# EAGLE board PCB v62 (EAGLE 9.7.0)
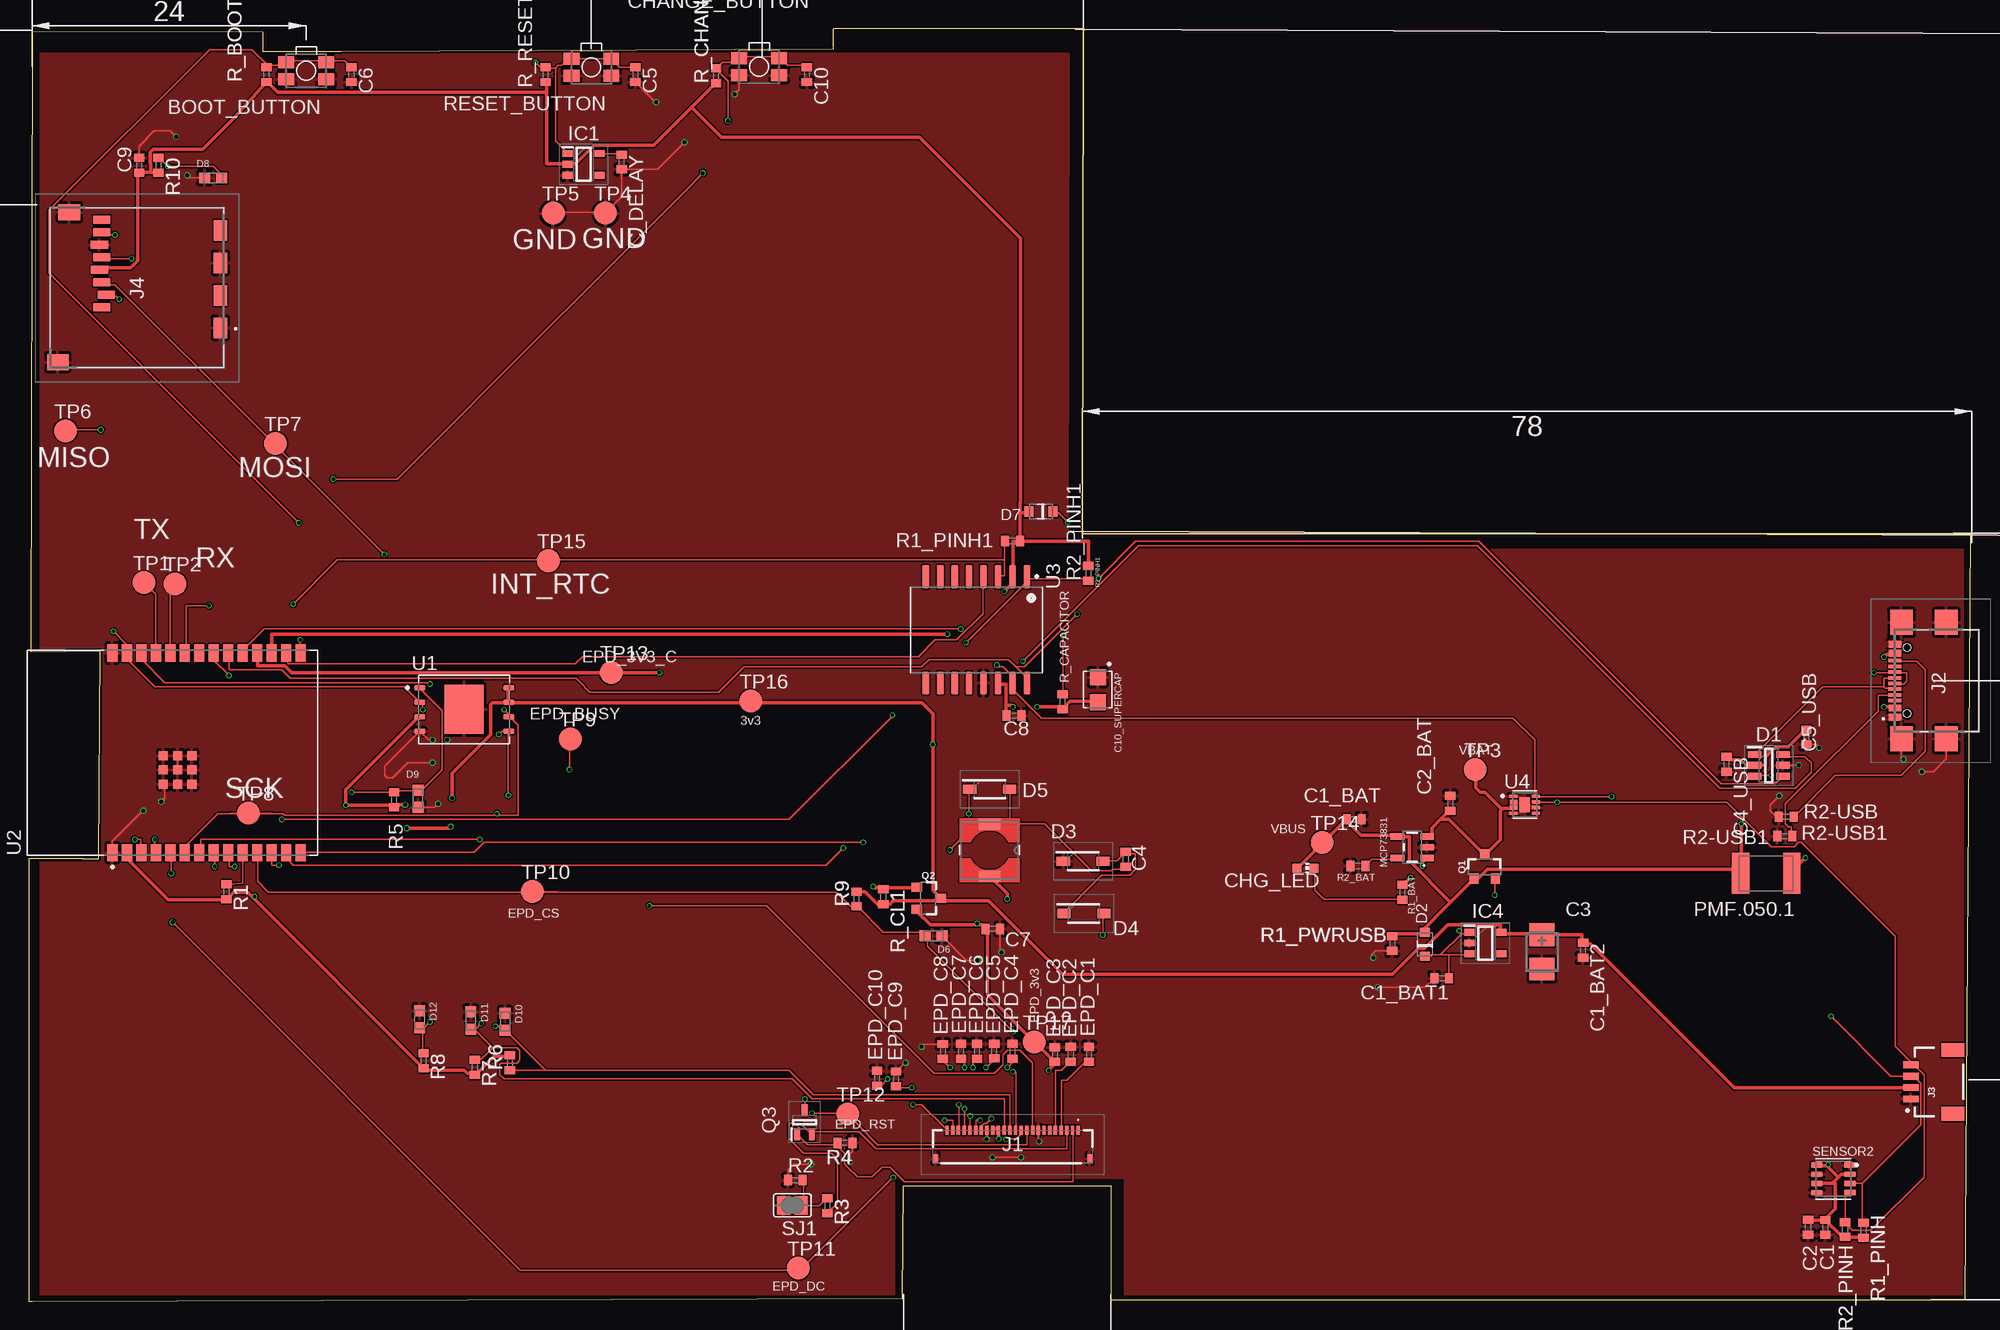
[diagram p0: board, top side]
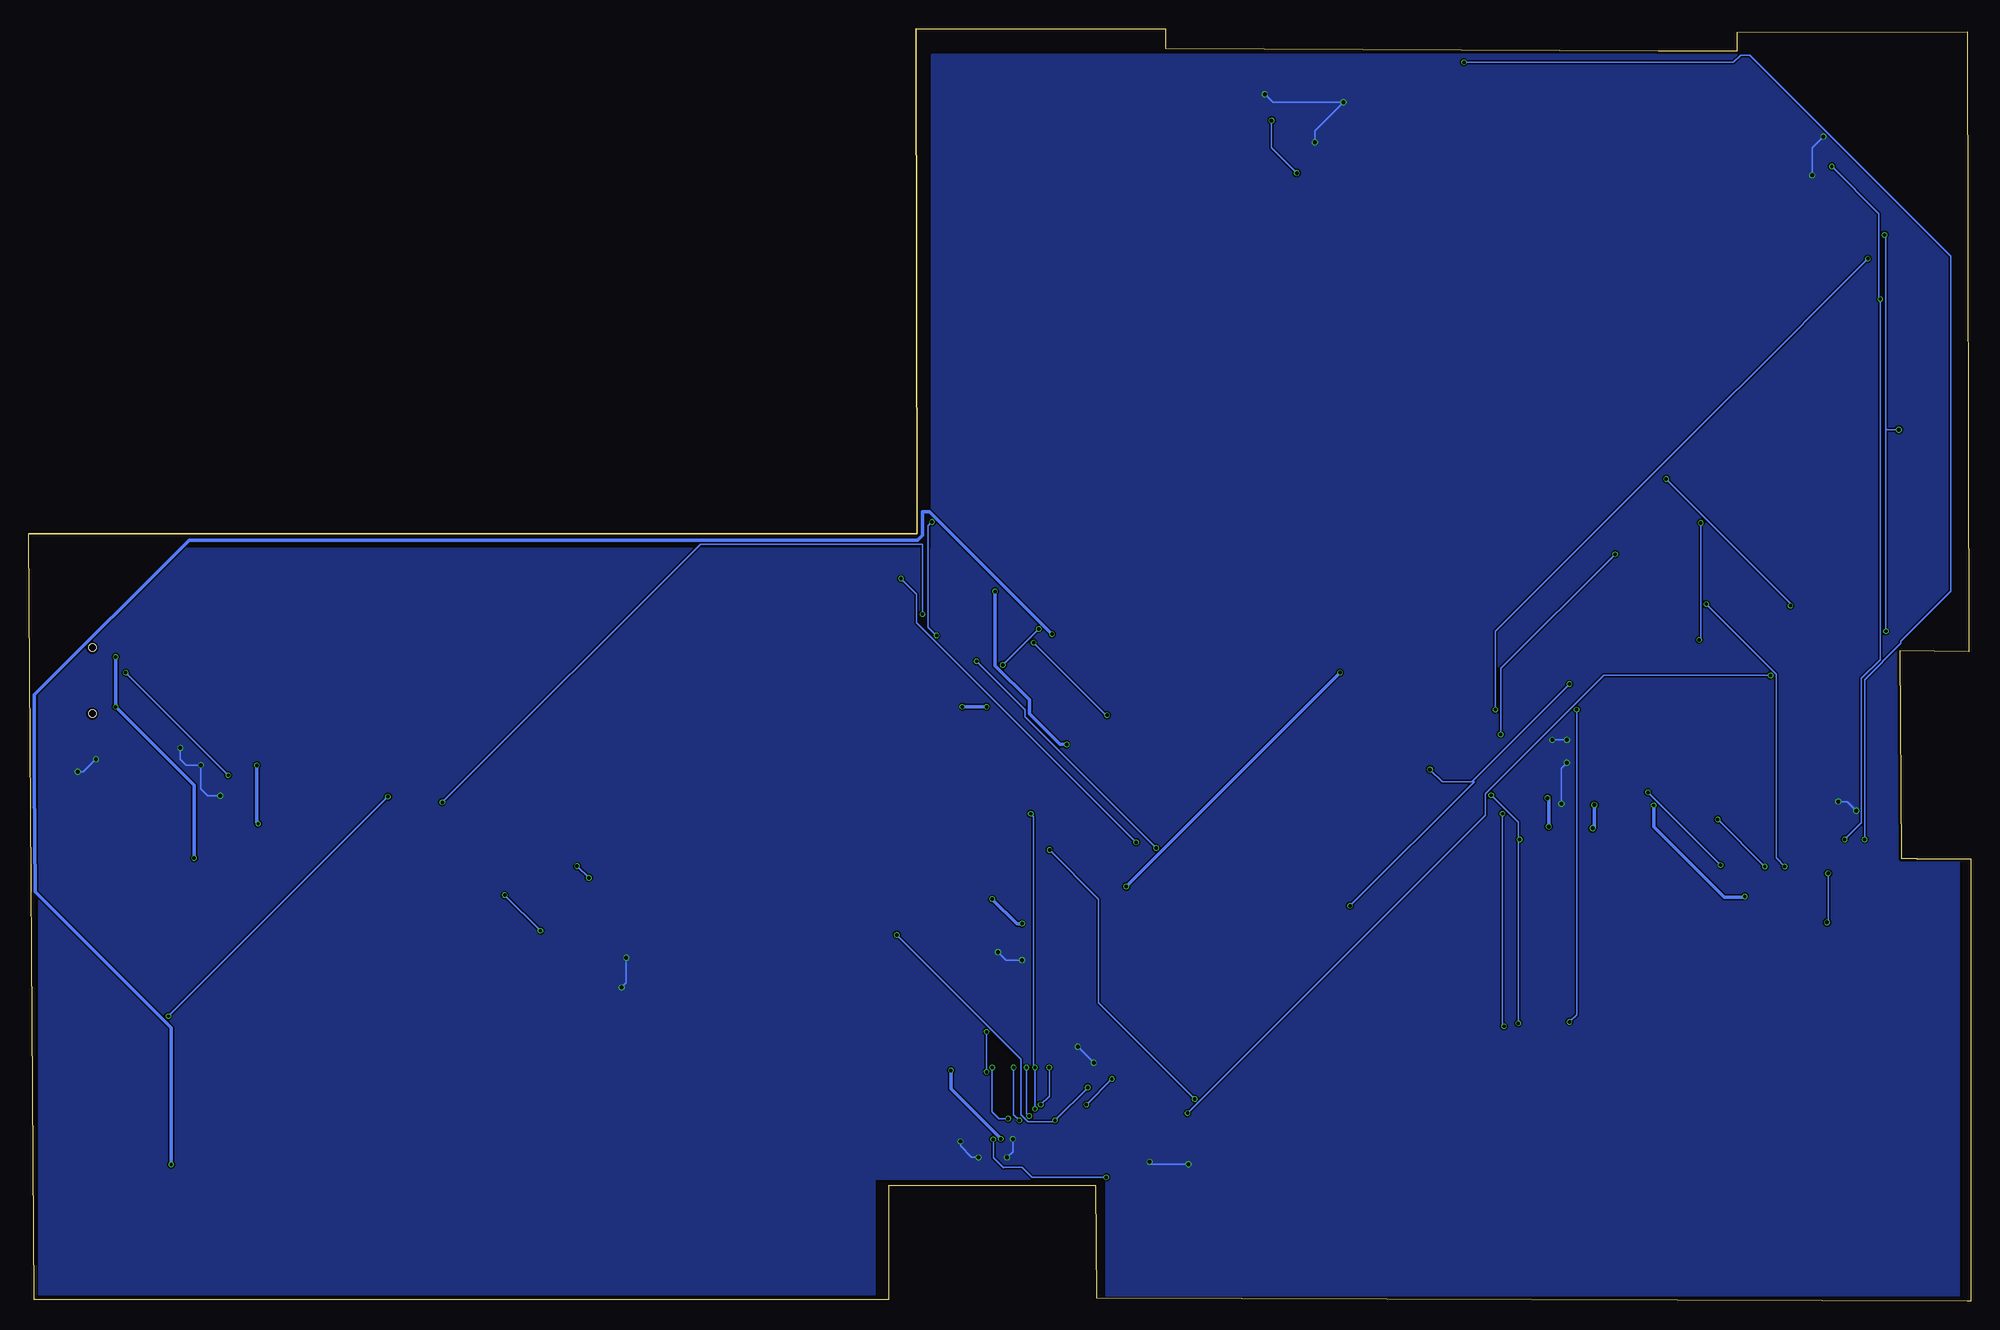
[diagram p1: board, bottom side, seen from below]

Size 170.35 x 111.57 mm. Coordinates in mm from the lower left corner, seen from the top.
Outline: 0.33,0 76.63,0.27 76.73,10.1 94.93,10.1 94.93,0.1 169.83,0.1 170.35,67.27 92.43,67.27 92.53,111.54 70.61,111.57 70.61,109.8 27.43,109.6 20.55,109.6 20.55,111.26 0.33,111.3 0.2,56.94 6.23,57.04 6.13,38.8 4.77,38.8 0,38.8 0.03,0 0.33,0
Copper layers (1*16): Top 0.035mm / dielectric 1.6mm / Bottom 0.035mm
Design rules "jlcpcb-2layers.dru": minimum track width 0.15mm, minimum drill 0.3mm, track to track 5mil, track to pad 5mil, pad to pad 5mil, via to via 5mil, smd to smd 5mil, copper to edge 0.2mm, drill to drill 6mil, minimum pad ring 10mil, minimum via ring 3mil, stop-mask expansion 4mil, vias tented up to drill 0mil, thermal gap 10mil
Net classes: 1 PowerLines: width 0.3 mm

## Footprints (pad centres in the part's own frame; a part is rotated, then mirrored left to right if it is on the bottom)
MYBUTTON = smd 1.4 x 1.05: 1 1.75,0.75; 2 -1.75,0.75; 3 -1.75,-0.75; 4 1.75,-0.75
EAGLE-LTSPICE_C0402 = smd 0.7 x 0.9: 1 -0.65,0; 2 0.65,0
RCL_CT3528 = smd 2 x 2.2: + -1.5,0; - 1.5,0
CAPCP3225X100N = smd 1.4 x 1.4: 1 -1.1,0; 2 1.1,0
ADAFRUIT_CHIP-LED0603 = smd 0.8 x 0.8: A 0,-0.75; C 0,0.75
SOT95P280X145-6N = smd 1.2 x 0.6: 1 -1.25,0.95; 2 -1.25,0; 3 -1.25,-0.95; 4 1.25,-0.95; 5 1.25,0; 6 1.25,0.95
ESP32_WROVER_AVX---SD0805S020S1R0_AVX_SD0805S020S1R0_0 = smd 0.8 x 0.9: 1 -1.05,0; 2 1.05,0
SOD3716X135N = smd 1.15 x 0.8: 1 -1.75,0; 2 1.75,0
DIOC1608X36N = smd 0.97 x 0.94: 1 -0.75,0; 2 0.75,0
SOT95P280X125-5N = smd 0.9 x 0.6: 1 -1.4,0.95; 2 -1.4,0; 3 -1.4,-0.95; 4 1.4,-0.95; 5 1.4,0.95
FH34SRJ24S05SH99 = smd 0.3 x 0.8: 1 5.75,1.45; 2 5.25,1.45; 3 4.75,1.45; 4 4.25,1.45; 5 3.75,1.45; 6 3.25,1.45; 7 2.75,1.45; 8 2.25,1.45; 9 1.75,1.45; 10 1.25,1.45; 11 0.75,1.45; 12 0.25,1.45; 13 -0.25,1.45; 14 -0.75,1.45; 15 -1.25,1.45; 16 -1.75,1.45; 17 -2.25,1.45; 18 -2.75,1.45; 19 -3.25,1.45; 20 -3.75,1.45; 21 -4.25,1.45; 22 -4.75,1.45; 23 -5.25,1.45; 24 -5.75,1.45 | smd 0.4 x 0.8: MP1 6.75,-1.05; MP2 -6.75,-1.05
SAMACSYS_PARTS_USB4110GFA = smd 0.3 x 1.099: A1 -3.35,3.678; A4 -2.55,3.678; A9 2.55,3.678; A12 3.35,3.678; B1 3.05,3.678; B4 2.25,3.678; B9 -2.25,3.678; B12 -3.05,3.678 | smd 0.3 x 1.15: A5 -1.25,3.678; A6 -0.25,3.678; A7 0.25,3.678; A8 1.25,3.678; B5 1.75,3.678; B6 0.75,3.678; B7 -0.75,3.678; B8 -1.75,3.678 | smd 2.18 x 2: MP1 -5.11,-0.827; MP2 5.11,-0.827; MP3 -5.11,3.103; MP4 5.11,3.103 | hole 0.65: -2.89,2.603; 2.89,2.603
JST04_1MM_RA = smd 0.6 x 1.35: 1 -1.5,0; 2 -0.5,0; 3 0.5,0; 4 1.5,0 | smd 1.2 x 2: NC1 2.8,-3.675; NC2 -2.8,-3.675
112ATAARR03ATTEND = smd 1.8 x 1.2: G1 10.6,10.4; G2 4.9,10.4; S1 7.75,10.4; S2 2.05,10.4 | smd 1.4 x 1.9: G3 13.6,-3.85; G4 0.45,-2.85 | smd 0.7 x 1.5: P1 8.8,0; P2 7.7,0.4; P3 6.6,0; P4 5.5,-0.2; P5 4.4,0; P6 3.3,-0.2; P7 2.2,0; P8 1.1,0
IND_4828-WE-TPC_WRE = smd 0.965 x 1.93: 1 -2.286,0; 2 2.286,0
ESP32_WROVER_SPARKFUN-IC-POWER_SOT23-5 = smd 0.55 x 1.2: 1 -0.95,-1.3; 2 0,-1.3; 3 0.95,-1.3; 4 0.95,1.3; 5 -0.95,1.3
ESP32C6_VARISTOR_CT/CN1812 = smd 1.5 x 3.6: 1 -2.25,0; 2 2.25,0
ESP32_WROVER_SPARKFUN-DISCRETESEMI_SOT23-3 = smd 0.8 x 0.9: 1 -0.95,-1; 2 0.95,-1; 3 0,1.1
SOT65P210X110-3N = smd 1.05 x 0.5: 1 -1.05,0.65; 2 -1.05,-0.65; 3 1.05,0
ESP32_WROVER_EAGLE-LTSPICE_R0402 = smd 0.7 x 0.9: 1 -0.65,0; 2 0.65,0
ESP32_WROVER_BME680_PSON80P300X300X100-8N = smd 1.016 x 0.5: 1 1.458,1.2; 2 1.458,0.4; 3 1.458,-0.4; 4 1.458,-1.2; 5 -1.458,-1.22; 6 -1.458,-0.4; 7 -1.458,0.4; 8 -1.458,1.2
SJ = smd 1.168 x 1.6: 1 -0.762,0; 2 0.762,0
TP20R = smd 2 x 2: TP 0,0
SON127P600X800X80-9N = smd 0.94 x 0.44: 1 -3.895,1.905; 2 -3.895,0.635; 3 -3.895,-0.635; 4 -3.895,-1.905; 5 3.895,-1.905; 6 3.895,-0.635; 7 3.895,0.635; 8 3.895,1.905 | smd 3.4 x 4.3: 9 0,0
XCVR_ESP32-C6-WROOM-1-N8 = smd 1.5 x 0.9: 1 -8.75,5.26; 2 -8.75,3.99; 3 -8.75,2.72; 4 -8.75,1.45; 5 -8.75,0.18; 6 -8.75,-1.09; 7 -8.75,-2.36; 8 -8.75,-3.63; 9 -8.75,-4.9; 10 -8.75,-6.17; 11 -8.75,-7.44; 12 -8.75,-8.71; 13 -8.75,-9.98; 14 -8.75,-11.25; 15 8.75,-11.25; 16 8.75,-9.98; 17 8.75,-8.71; 18 8.75,-7.44; 19 8.75,-6.17; 20 8.75,-4.9; 21 8.75,-3.63; 22 8.75,-2.36; 23 8.75,-1.09; 24 8.75,0.18; 25 8.75,1.45; 26 8.75,2.72; 27 8.75,3.99; 28 8.75,5.26 | smd 0.8 x 0.8: 29_1 -2.755,0.79; 29_2 -1.505,0.79; 29_3 -0.255,0.79; 29_4 -2.755,-0.46; 29_5 -1.505,-0.46; 29_6 -0.255,-0.46; 29_7 -2.755,-1.71; 29_8 -1.505,-1.71; 29_9 -0.255,-1.71
SOIC127P1032X265-16N = smd 2.05 x 0.59: 1 -4.655,4.445; 2 -4.655,3.175; 3 -4.655,1.905; 4 -4.655,0.635; 5 -4.655,-0.635; 6 -4.655,-1.905; 7 -4.655,-3.175; 8 -4.655,-4.445; 9 4.655,-4.445; 10 4.655,-3.175; 11 4.655,-1.905; 12 4.655,-0.635; 13 4.655,0.635; 14 4.655,1.905; 15 4.655,3.175; 16 4.655,4.445
SON50P200X200X80-9N = smd 0.76 x 0.27: 1 -0.985,0.75; 4 -0.985,-0.75; 5 0.985,-0.75; 6 0.985,-0.25; 7 0.985,0.25; 8 0.985,0.75 | smd 0.762 x 0.406: 2 -0.985,0.25; 3 -0.985,-0.25 | smd 0.9 x 1.3: 9 0,0

## Placement (x,y rotation side)
BOOT_BUTTON  BUTTON_CUSYOMV1  [MYBUTTON]  24.35,107.86 180 top
C1  100nF  [EAGLE-LTSPICE_C0402]  157.56,6.46 270 top
C1_BAT  4.7uF  [EAGLE-LTSPICE_C0402]  116.26,42.25 0 top
C1_BAT1  4.7uF  [EAGLE-LTSPICE_C0402]  123.92,28.31 180 top
C1_BAT2  4.7uF  [EAGLE-LTSPICE_C0402]  136.32,30.75 270 top
C2  100nF  [EAGLE-LTSPICE_C0402]  156.06,6.48 270 top
C2_BAT  4.7uF  [EAGLE-LTSPICE_C0402]  124.68,43.64 90 top
C3  100uF  [RCL_CT3528]  132.73,30.61 270 top
C4  4.7uF/25V  [EAGLE-LTSPICE_C0402]  96.22,38.75 270 top
C4_USB  100nF  [EAGLE-LTSPICE_C0402]  148.9,47.06 270 top
C5  1uF  [EAGLE-LTSPICE_C0402]  53.22,107.53 270 top
C5_USB  4.7uF  [EAGLE-LTSPICE_C0402]  155.9,49.45 270 top
C6  100nF  [EAGLE-LTSPICE_C0402]  28.32,107.53 270 top
C7  10uF  [EAGLE-LTSPICE_C0402]  84.56,32.63 0 top
C8  100nF  [EAGLE-LTSPICE_C0402]  86.43,51.33 0 top
C9  100nF  [EAGLE-LTSPICE_C0402]  9.7,99.58 90 top
C10  100nF  [EAGLE-LTSPICE_C0402]  68.26,107.53 270 top
C10_SUPERCAP  CPH3225A  [CAPCP3225X100N]  93.77,53.61 270 top
C_DELAY  100nF  [EAGLE-LTSPICE_C0402]  52.02,99.87 270 top
CHANGE_BUTTON  BUTTON_CUSYOMV1  [MYBUTTON]  64.07,108.23 180 top
CHG_LED  [ADAFRUIT_CHIP-LED0603]  111.98,37.96 270 top
D1  USBLC6-2SC6Y  [SOT95P280X145-6N]  152.61,46.97 0 top
D2  ESP32_WROVER_AVX---SD0805S020S1R0_AVX_SD0805S020S1R0_0_0AVX_SD0805S020S1R0_0_0  [ESP32_WROVER_AVX---SD0805S020S1R0_AVX_SD0805S020S1R0_0]  122.45,31.29 90 top
D3  MBR0530  [SOD3716X135N]  92.49,38.57 0 top
D4  MBR0530  [SOD3716X135N]  92.55,33.98 0 top
D5  MBR0530  [SOD3716X135N]  84.29,44.88 0 top
D6  PGB1010603MR  [DIOC1608X36N]  79.35,32.03 180 top
D7  ESP32_WROVER_AVX---SD0805S020S1R0_AVX_SD0805S020S1R0_0_0AVX_SD0805S020S1R0_0_0  [ESP32_WROVER_AVX---SD0805S020S1R0_AVX_SD0805S020S1R0_0]  88.79,69.22 180 top
D8  PGB1010603MR  [DIOC1608X36N]  16.19,98.47 0 top
D9  PGB1010603MR  [DIOC1608X36N]  34.16,44.04 90 top
D10  PGB1010603MR  [DIOC1608X36N]  41.8,24.48 270 top
D11  PGB1010603MR  [DIOC1608X36N]  38.8,24.6 270 top
D12  PGB1010603MR  [DIOC1608X36N]  34.3,24.72 270 top
EPD_C1  1uF/50V  [EAGLE-LTSPICE_C0402]  93,21.64 270 top
EPD_C2  1uF/50V  [EAGLE-LTSPICE_C0402]  91.4,21.63 270 top
EPD_C3  1uF/50V  [EAGLE-LTSPICE_C0402]  90,21.62 270 top
EPD_C4  1uF/50V  [EAGLE-LTSPICE_C0402]  86.3,21.91 270 top
EPD_C5  1uF/50V  [EAGLE-LTSPICE_C0402]  84.68,21.92 270 top
EPD_C6  1uF/50V  [EAGLE-LTSPICE_C0402]  83.18,21.91 270 top
EPD_C7  1uF/50V  [EAGLE-LTSPICE_C0402]  81.78,21.9 270 top
EPD_C8  1uF/50V  [EAGLE-LTSPICE_C0402]  80.18,21.89 270 top
EPD_C9  1uF/50V  [EAGLE-LTSPICE_C0402]  76.08,19.48 270 top
EPD_C10  1uF/50V  [EAGLE-LTSPICE_C0402]  74.42,19.53 270 top
IC1  BD5229G-TR  [SOT95P280X125-5N]  48.68,99.67 0 top
IC4  XC6220A331MR-G  [SOT95P280X125-5N]  127.76,31.39 0 top
J1  FH34SRJ-24S-0.5SH_99_  [FH34SRJ24S05SH99]  86.3,13.54 0 top
J2  SAMACSYS_PARTS_USB4110-GF-A  [SAMACSYS_PARTS_USB4110GFA]  167.36,54.4 90 top
J3  QWIIC_RIGHT_ANGLE  [JST04_1MM_RA]  165.08,19.22 90 top
J4  112A-TAAR-R03_ATTEND  [112ATAARR03ATTEND]  6.42,95.92 270 top
L1  744043680IND_4828-WE-TPC_WRE  [IND_4828-WE-TPC_WRE]  84.28,39.53 270 top
MCP73831  ESP32_WROVER_SPARKFUN-IC-POWER_MCP73831  [ESP32_WROVER_SPARKFUN-IC-POWER_SOT23-5]  121.34,39.79 90 top
PMF.050.1  ESP32C6_VARISTORCN1812  [ESP32C6_VARISTOR_CT/CN1812]  152.39,37.5 180 top
Q1  20V/4.2A/52mΩ/1.4W  [ESP32_WROVER_SPARKFUN-DISCRETESEMI_SOT23-3]  127.69,38.06 0 top
Q2  20V/4.2A/52mΩ/1.4W  [ESP32_WROVER_SPARKFUN-DISCRETESEMI_SOT23-3]  78.89,35.32 270 top
Q3  SI1308EDL-T1-GE3  [SOT65P210X110-3N]  68.05,15.69 90 top
R1  10K  [ESP32_WROVER_EAGLE-LTSPICE_R0402]  17.36,35.89 270 top
R1_BAT  200  [ESP32_WROVER_EAGLE-LTSPICE_R0402]  120.48,35.85 270 top
R1_PINH  10K  [ESP32_WROVER_EAGLE-LTSPICE_R0402]  160.92,6.21 270 top
R1_PINH1  10K  [ESP32_WROVER_EAGLE-LTSPICE_R0402]  86.29,66.64 0 top
R1_PWRUSB  100K  [ESP32_WROVER_EAGLE-LTSPICE_R0402]  119.59,31.35 90 top
R2  2.2  [ESP32_WROVER_EAGLE-LTSPICE_R0402]  67.24,10.61 0 top
R2-USB  5k1  [ESP32_WROVER_EAGLE-LTSPICE_R0402]  154.15,42.47 180 top
R2-USB1  5k1  [ESP32_WROVER_EAGLE-LTSPICE_R0402]  154.01,40.77 0 top
R2_BAT  2K  [ESP32_WROVER_EAGLE-LTSPICE_R0402]  116.57,38.15 180 top
R2_PINH  10K  [ESP32_WROVER_EAGLE-LTSPICE_R0402]  159.3,6.28 270 top
R2_PINH1  10K  [ESP32_WROVER_EAGLE-LTSPICE_R0402]  92.94,63.81 90 top
R3  0.47  [ESP32_WROVER_EAGLE-LTSPICE_R0402]  70.06,8.35 270 top
R4  10K  [ESP32_WROVER_EAGLE-LTSPICE_R0402]  71.6,13.87 180 top
R5  10K  [ESP32_WROVER_EAGLE-LTSPICE_R0402]  32.06,43.95 270 top
R6  10K  [ESP32_WROVER_EAGLE-LTSPICE_R0402]  42.22,20.89 90 top
R7  10K  [ESP32_WROVER_EAGLE-LTSPICE_R0402]  39.14,20.49 270 top
R8  10K  [ESP32_WROVER_EAGLE-LTSPICE_R0402]  34.64,21.07 270 top
R9  10K  [ESP32_WROVER_EAGLE-LTSPICE_R0402]  72.62,35.25 90 top
R10  10K  [ESP32_WROVER_EAGLE-LTSPICE_R0402]  11.4,99.59 270 top
R_BOOT  10K  [ESP32_WROVER_EAGLE-LTSPICE_R0402]  20.86,107.53 90 top
R_CAPACITOR  15  [ESP32_WROVER_EAGLE-LTSPICE_R0402]  90.69,52.55 90 top
R_CHANGE  10K  [ESP32_WROVER_EAGLE-LTSPICE_R0402]  60.29,107.42 90 top
R_CL1  10K  [ESP32_WROVER_EAGLE-LTSPICE_R0402]  74.96,35.44 270 top
R_RESET  10K  [ESP32_WROVER_EAGLE-LTSPICE_R0402]  45.34,107.53 90 top
RESET_BUTTON  BUTTON_CUSYOMV1  [MYBUTTON]  49.36,108.16 180 top
SENSOR2  ESP32_WROVER_BME680_BME680  [ESP32_WROVER_BME680_PSON80P300X300X100-8N]  158.28,10.72 0 top
SJ1  [SJ]  66.99,8.39 0 top
TP1  TPTP20R  [TP20R]  10.14,62.99 0 top
TP2  TPTP20R  [TP20R]  12.86,62.89 0 top
TP3  TPTP20R  [TP20R]  126.88,46.59 0 top
TP4  TPTP20R  [TP20R]  50.6,95.39 0 top
TP5  TPTP20R  [TP20R]  46.02,95.39 0 top
TP6  TPTP20R  [TP20R]  3.24,76.29 0 top
TP7  TPTP20R  [TP20R]  21.66,75.19 0 top
TP8  TPTP20R  [TP20R]  19.28,42.79 0 top
TP9  TPTP20R  [TP20R]  47.5,49.29 0 top
TP10  TPTP20R  [TP20R]  44.19,35.91 0 top
TP11  TPTP20R  [TP20R]  67.52,2.89 0 top
TP12  TPTP20R  [TP20R]  71.84,16.41 0 top
TP13  TPTP20R  [TP20R]  51.09,55.11 0 top
TP14  TPTP20R  [TP20R]  113.44,40.21 0 top
TP15  TPTP20R  [TP20R]  45.59,64.91 0 top
TP16  TPTP20R  [TP20R]  63.34,52.61 0 top
TP17  TPTP20R  [TP20R]  88.19,22.71 0 top
U1  W25Q512JVEIQ  [SON127P600X800X80-9N]  38.21,51.87 0 top
U2  ESP32-C6-WROOM-1-N8  [XCVR_ESP32-C6-WROOM-1-N8]  12.62,48.08 90 top
U3  DS3231SN#  [SOIC127P1032X265-16N]  83.13,58.85 270 top
U4  MAX17048G+T10  [SON50P200X200X80-9N]  131.21,43.52 0 top

## Library data of the parts
BOOT_BUTTON CHANGE_BUTTON CHG_LED PMF.050.1 RESET_BUTTON SJ1 TP1-TP17 = DeskAssistant v19 v1
C1 C1_BAT C1_BAT1 C1_BAT2 C2 C2_BAT C4 C4_USB C5 C5_USB C6-C10 C_DELAY EPD_C1-EPD_C10 = DeskAssistant v19 v1; SPICEMODEL: NONE; SPICEPREFIX: C
C3 = DeskAssistant v19 v1; SPICEPREFIX: C
C10_SUPERCAP = DeskAssistant v19 v1; AVAILABILITY: Not in stock; CHECK_PRICES: https://www.snapeda.com/parts/CPH3225A/Seiko+Instruments/view-part/?ref=eda; DESCRIPTION: 11 mF (EDLC) Supercapacitor 3.3 V 1210 (3225 Metric) - -; MF: Seiko Instruments; MP: CPH3225A; PACKAGE: 1210 Seiko; PRICE: None; PURCHASE-URL: https://www.snapeda.com/api/url_track_click_mouser/?unipart_id=562593&manufacturer=Seiko Instruments&part_name=CPH3225A&search_term=None; SNAPEDA_LINK: https://www.snapeda.com/parts/CPH3225A/Seiko+Instruments/view-part/?ref=snap
D1 = DeskAssistant v19 v1; AVAILABILITY: In Stock; CHECK_PRICES: https://www.snapeda.com/parts/USBLC6-2SC6Y/STMicroelectronics/view-part/?ref=eda; DESCRIPTION: 17V Clamp 5A (8/20µs) Ipp Tvs Diode Surface Mount SOT-23-6; MF: STMicroelectronics; MP: USBLC6-2SC6Y; PACKAGE: SOT-23-6 STMicroelectronics; PRICE: None; SNAPEDA_LINK: https://www.snapeda.com/parts/USBLC6-2SC6Y/STMicroelectronics/view-part/?ref=snap
D2 D7 = DeskAssistant v19 v1; CENTROID_NOT_SPECIFIED: No; DATASHEET: http://datasheets.avx.com/schottky.pdf; DIGIKEY_DESCRIPTION: DIODE SCHOTTKY 20V 1A 0805; DIGIKEY_PART_NUMBER: 478-7800-1-ND; LEAD_FREE: yes; MF: AVX; MOUSER_PART_NUMBER: 581-SD0805S020S1R0; PACKAGE: 0805 (2012 metric); PREFIX: D; ROHS: yes; TEMPERATURE_RANGE_HIGH: +125°C; TEMPERATURE_RANGE_LOW: -55°C
D3-D5 = DeskAssistant v19 v1; AVAILABILITY: In Stock; CHECK_PRICES: https://www.snapeda.com/parts/MBR0530/Onsemi/view-part/?ref=eda; DESCRIPTION: Diode Schottky 30 V 500mA Surface Mount SOD-123; MF: ON Semiconductor; MP: MBR0530; PACKAGE: SOD-123-2 ON Semiconductor; PRICE: None; PURCHASE-URL: https://www.snapeda.com/api/url_track_click_mouser/?unipart_id=179458&manufacturer=ON Semiconductor&part_name=MBR0530&search_term=None; SNAPEDA_LINK: https://www.snapeda.com/parts/MBR0530/Onsemi/view-part/?ref=snap
D6 D8-D12 = DeskAssistant v19 v1; AVAILABILITY: In Stock; CHECK_PRICES: https://www.snapeda.com/parts/PGB1010603MR/Littelfuse/view-part/?ref=eda; DESCRIPTION: 150V (Typ) Clamp - Ipp Tvs Diode Surface Mount 0603 (1608 Metric); MF: Littelfuse Inc.; MP: PGB1010603MR; PACKAGE: 0603 Littelfuse Inc.; PRICE: None; PURCHASE-URL: https://www.snapeda.com/api/url_track_click_mouser/?unipart_id=5659453&manufacturer=Littelfuse Inc.&part_name=PGB1010603MR&search_term=None; SNAPEDA_LINK: https://www.snapeda.com/parts/PGB1010603MR/Littelfuse/view-part/?ref=snap
IC1 = DeskAssistant v19 v1; DESCRIPTION: Voltage Detector with Adjustable Delay Time: CMOS processes are utilized to develop high precision, low current consumption CMOS reset ICs that allow arbitrary setting of the delay time. The extensive lineup includes both Nch Open Drain and CMOS output types in a wide range of detection voltages (from 2.3V to 6.0V, in 0.1V steps), enabling selection of the ideal solution based on customer requirements. In addition, the entire series is of course both lead-free and RoHS-compliant.; HEIGHT: 1.25mm; MANUFACTURER_NAME: ROHM Semiconductor; MANUFACTURER_PART_NUMBER: BD5229G-TR; MOUSER_PART_NUMBER: 755-BD5229G-TR; MOUSER_PRICE-STOCK: https://www.mouser.co.uk/ProductDetail/ROHM-Semiconductor/BD5229G-TR?qs=4kLU8WoGk0vvnhrrYwdszw%3D%3D
IC4 = DeskAssistant v19 v1; DESCRIPTION: LDO Voltage Regulators; HEIGHT: 1.2mm; MANUFACTURER_NAME: Torex; MANUFACTURER_PART_NUMBER: XC6220A331MR-G; MOUSER_PART_NUMBER: 865-XC6220A331MR-G; MOUSER_PRICE-STOCK: https://www.mouser.co.uk/ProductDetail/Torex-Semiconductor/XC6220A331MR-G?qs=AsjdqWjXhJ8ZSWznL1J0gg%3D%3D
J1 = DeskAssistant v19 v1; DESCRIPTION: 24 Position FFC, FPC Connector Contacts, Top and Bottom 0.020" (0.50mm) Surface Mount, Right Angle; HEIGHT: 1.1mm; MANUFACTURER_NAME: Hirose; MANUFACTURER_PART_NUMBER: FH34SRJ-24S-0.5SH(99); MOUSER_PART_NUMBER: 798-FH34SRJ24S05SH99; MOUSER_PRICE-STOCK: https://www.mouser.co.uk/ProductDetail/Hirose-Connector/FH34SRJ-24S-0.5SH99?qs=vcbW%252B4%252BSTIpKBl5ap9J8Fw%3D%3D
J2 = DeskAssistant v19 v1; DESCRIPTION: CONN USB 2.0 TYPE-C R/A SMT; HEIGHT: 3.26mm; MANUFACTURER_NAME: GCT (GLOBAL CONNECTOR TECHNOLOGY); MANUFACTURER_PART_NUMBER: USB4110-GF-A; MOUSER_PART_NUMBER: 640-USB4110-GF-A; MOUSER_PRICE-STOCK: https://www.mouser.co.uk/ProductDetail/GCT/USB4110-GF-A?qs=KUoIvG%2F9IlYiZvIXQjyJeA%3D%3D
J3 = DeskAssistant v19 v1; PROD_ID: CONN-13694
J4 = DeskAssistant v19 v1; DESCRIPTION: Micro SD Card Socket, Push-Push Type, Top Mount, SMT, H=1.83mm, 10u; HEIGHT: 1.9mm; MANUFACTURER_NAME: ATTEND; MANUFACTURER_PART_NUMBER: 112A-TAAR-R03 ATTEND
L1 = DeskAssistant v19 v1; COPYRIGHT: Copyright (C) 2024 Ultra Librarian. All rights reserved.; MANUFACTURER_PART_NUMBER: 744043680; MFR_NAME: Wurth Electronics
MCP73831 = DeskAssistant v19 v1; PROD_ID: IC-09995
Q1 Q2 = DeskAssistant v19 v1; PROD_ID: TRAN-14388
Q3 = DeskAssistant v19 v1; AVAILABILITY: In Stock; CHECK_PRICES: https://www.snapeda.com/parts/SI1308EDL-T1-GE3/Vishay+Siliconix/view-part/?ref=eda; DESCRIPTION: Si1308EDL-T1-GE3 N-channel MOSFET Transistor, 1.5 A, 30 V, 3-Pin SC-70 | Siliconix / Vishay SI1308EDL-T1-GE3; MF: Vishay Siliconix; MP: SI1308EDL-T1-GE3; PACKAGE: SOT-323 Vishay Semiconductor; PRICE: None; PURCHASE-URL: https://www.snapeda.com/api/url_track_click_mouser/?unipart_id=274603&manufacturer=Vishay Siliconix&part_name=SI1308EDL-T1-GE3&search_term=None; SNAPEDA_LINK: https://www.snapeda.com/parts/SI1308EDL-T1-GE3/Vishay+Siliconix/view-part/?ref=snap
R1 R1_BAT R1_PINH R1_PINH1 R1_PWRUSB R2 R2-USB R2-USB1 R2_BAT R2_PINH R2_PINH1 R3-R10 R_BOOT R_CAPACITOR R_CHANGE R_CL1 R_RESET = DeskAssistant v19 v1; SPICEMODEL: NONE; SPICEPREFIX: R
SENSOR2 = DeskAssistant v19 v1; AVAILABILITY: Unavailable; DESCRIPTION: Integrated Environmental Unit; MF: Bosch Sensortec; MP: BME680; PACKAGE: LGA-8 Bosch Tools; PRICE: None
U1 = DeskAssistant v19 v1; AVAILABILITY: In Stock; CHECK_PRICES: https://www.snapeda.com/parts/W25Q512JVEIQ/Winbond+Electronics/view-part/?ref=eda; DESCRIPTION: FLASH - NOR Memory IC 512Mb (64M x 8) SPI - Quad I/O 133 MHz 8-WSON (8x6); MF: Winbond Electronics; MP: W25Q512JVEIQ; PACKAGE: Package; PRICE: None; SNAPEDA_LINK: https://www.snapeda.com/parts/W25Q512JVEIQ/Winbond+Electronics/view-part/?ref=snap
U2 = DeskAssistant v19 v1; AVAILABILITY: In Stock; CHECK_PRICES: https://www.snapeda.com/parts/ESP32-C6-WROOM-1-N8/Espressif+Systems/view-part/?ref=eda; DESCRIPTION: Multiprotocol Modules ESP32-C6 module, Wi-Fi 6 in 2.4 GHz band, Bluetooth 5, Zigbee 3.0 and Thread. ESP34-WROOM Compatible - ENGINEERING SAMPLE; MF: Espressif Systems; MP: ESP32-C6-WROOM-1-N8; PACKAGE: None; PRICE: None; SNAPEDA_LINK: https://www.snapeda.com/parts/ESP32-C6-WROOM-1-N8/Espressif+Systems/view-part/?ref=snap
U3 = DeskAssistant v19 v1; AVAILABILITY: In Stock; CHECK_PRICES: https://www.snapeda.com/parts/DS3231SN%23/Analog+Devices/view-part/?ref=eda; DESCRIPTION: Extremely Accurate I²C-Integrated RTC/TCXO/Crystal; MF: Analog Devices; MP: DS3231SN#; PACKAGE: SOIC-16 Maxim; PRICE: None; PURCHASE-URL: https://www.snapeda.com/api/url_track_click_mouser/?unipart_id=99048&manufacturer=Analog Devices&part_name=DS3231SN#&search_term=None; SNAPEDA_LINK: https://www.snapeda.com/parts/DS3231SN%23/Analog+Devices/view-part/?ref=snap
U4 = DeskAssistant v19 v1; AVAILABILITY: In Stock; CHECK_PRICES: https://www.snapeda.com/parts/MAX17048G+T10/Analog+Devices/view-part/?ref=eda; DESCRIPTION: 3µA 1-Cell/2-Cell Fuel Gauge with ModelGauge; MF: Analog Devices; MP: MAX17048G+T10; PACKAGE: TDFN-8 Maxim; PRICE: None; PURCHASE-URL: https://www.snapeda.com/api/url_track_click_mouser/?unipart_id=329239&manufacturer=Analog Devices&part_name=MAX17048G+T10&search_term=None; SNAPEDA_LINK: https://www.snapeda.com/parts/MAX17048G+T10/Analog+Devices/view-part/?ref=snap

## Nets
3V3 [PowerLines]: C1_BAT2.1 C3.+ C9.1 D7.2 IC1.2 IC4.5 J3.2 J4.P4 Q2.3 R1.2 R1_PINH1.2 R2_PINH1.2 R5.2 R6.2 R7.2 R8.2 R9.2 R10.2 R_BOOT.1 R_CHANGE.1 R_CL1.2 R_RESET.1 TP16.TP U1.3 U1.7 U1.8 U2.2 U3.2
32KHZ: R2_PINH1.1 U2.9 U3.1
DN: D1.1 J2.A7 J2.B7
DP: D1.3 J2.A6 J2.B6
EPD_3V3 [PowerLines]: C7.1 EPD_C3.2 J1.15 J1.16 L1.2 Q2.2 TP17.TP
EPD_3V3_C [PowerLines]: Q2.1 R_CL1.1 TP13.TP U2.18
EPD_BUSY: J1.9 TP9.TP U2.26
EPD_CS: D6.2 J1.12 R9.1 TP10.TP U2.11
EPD_DC: J1.11 TP11.TP U2.5
EPD_RST: J1.10 TP12.TP U2.21
FLASH_CS: D9.2 R5.1 U1.1 U2.12
GDR: J1.2 Q3.1 R4.2
GND: BOOT_BUTTON.1 BOOT_BUTTON.2 C1.2 C1_BAT1.2 C1_BAT2.2 C1_BAT.2 C2.2 C2_BAT.2 C3.- C4_USB.2 C5.2 C5_USB.2 C6.2 C7.2 C8.2 C9.2 C10.2 C10_SUPERCAP.1 C_DELAY.2 CHANGE_BUTTON.1 CHANGE_BUTTON.2 D1.5 D3.1 D6.1 D8.1 D9.1 D10.1 D11.1 D12.1 EPD_C1.1 EPD_C2.1 EPD_C3.1 EPD_C4.1 EPD_C5.1 EPD_C6.1 EPD_C7.1 EPD_C8.1 EPD_C9.1 EPD_C10.1 IC1.3 IC4.2 J1.8 J1.17 J1.MP1 J1.MP2 J2.A1 J2.A12 J2.B1 J2.B12 J2.MP1 J2.MP2 J2.MP3 J2.MP4 J3.1 J4.G1 J4.G2 J4.G3 J4.G4 J4.P6 MCP73831.2 R1_PWRUSB.1 R2-USB1.1 R2-USB.2 R2.1 R2_BAT.2 R4.1 RESET_BUTTON.1 RESET_BUTTON.2 SENSOR2.1 SENSOR2.5 SENSOR2.7 SJ1.1 TP4.TP TP5.TP U1.4 U1.9 U2.1 U2.28 U2.29_1 U2.29_2 U2.29_3 U2.29_4 U2.29_5 U2.29_6 U2.29_7 U2.29_8 U2.29_9 U3.13 U4.1 U4.4 U4.6 U4.9
GPIO8: R1.1 U2.10
I2C_PW [PowerLines]: C1.1 C2.1 R1_PINH.2 R2_PINH.2 SENSOR2.2 SENSOR2.6 SENSOR2.8 U2.17
INT_RTC: R1_PINH1.1 TP15.TP U2.8 U3.3
IO/BOOT: BOOT_BUTTON.3 BOOT_BUTTON.4 C6.1 R_BOOT.2 U2.15
IO/CHANGE: C10.1 CHANGE_BUTTON.3 CHANGE_BUTTON.4 R_CHANGE.2 U2.23
MISO: D12.2 J4.P7 R8.1 TP6.TP U1.2 U2.27
MOSI: D11.2 J1.14 J4.P3 R7.1 TP7.TP U1.5 U2.7
N$1: J2.A5 R2-USB1.2
N$2: J2.B5 R2-USB.1
N$3: D7.1 R_CAPACITOR.2
N$4: C1_BAT1.1 D2.1 IC4.1 IC4.3 Q1.2
N$5: C4.1 D3.2 D4.1
N$8: CHG_LED.C R1_BAT.2
N$10: MCP73831.1 R1_BAT.1
N$11: EPD_C2.2 J1.5
N$12: MCP73831.5 R2_BAT.1
N$14: EPD_C1.2 J1.4
N$19: C_DELAY.1 IC1.5
N$23: EPD_C4.2 J1.18
N$24: EPD_C5.2 J1.19
N$25: EPD_C6.2 J1.20
N$27: EPD_C8.2 J1.22
N$29: EPD_C10.2 J1.24
PREVGH: D5.1 EPD_C7.2 J1.21
PREVGL: D4.2 EPD_C9.2 J1.23
RESE: J1.3 Q3.2 R3.2
RESE': R2.2 R3.1 SJ1.2
RESET: C5.1 IC1.1 R_RESET.2 RESET_BUTTON.3 RESET_BUTTON.4 U2.3
RTC_RST: U2.16 U3.4
RX: TP2.TP U2.24
SCK: D10.2 J1.13 J4.P5 R6.1 TP8.TP U1.6 U2.6
SCL: J3.4 R2_PINH.1 SENSOR2.4 U2.20 U3.16 U4.7
SDA: J3.3 R1_PINH.1 SENSOR2.3 U2.19 U3.15 U4.8
SRC: C4.2 D5.2 L1.1 Q3.3
SS_SD: D8.2 J4.P2 R10.1 U2.4
TX: TP1.TP U2.25
USB_D+: D1.4 U2.14
USB_D-: D1.6 U2.13
VBAT [PowerLines]: C2_BAT.1 MCP73831.3 Q1.3 TP3.TP U4.2 U4.3
VBUS [PowerLines]: C1_BAT.1 C4_USB.1 C5_USB.1 CHG_LED.A D1.2 D2.2 MCP73831.4 PMF.050.1.2 Q1.1 R1_PWRUSB.2 TP14.TP
VRTC [PowerLines]: C8.1 C10_SUPERCAP.2 R_CAPACITOR.1 U3.14
VUSB [PowerLines]: J2.A4 J2.A9 J2.B4 J2.B9 PMF.050.1.1

## Tracks (layer width: path | path; a pad name or v marks a point on that pad's centre or on a via)
3V3  (via drill 0.3, 0.35)
  Top 0.3: 45.46,105.97 45.46,99.72 47.21,99.72 IC1.2 47.33,99.72 47.96,99.72 49.58,101.35 54.83,101.35 58.16,104.67 | 45.46,105.97 45.46,106.85 R_RESET.1 | 58.16,104.67 60.21,106.72 R_CHANGE.1 | 10.71,98.97 11.33,98.97 R10.2 | 10.71,98.97 9.71,98.97 C9.1 9.58,98.85 9.58,91.22 8.96,90.6 6.46,90.6 6.33,90.47 J4.P4 | 45.46,105.97 21.83,105.97 20.96,106.85 R_BOOT.1 18.02,103.74 15.26,100.97 10.95,100.97 10.68,100.7 10.68,99.77 10.71,99.74 10.71,98.97 | U1.7 42.08,52.48 41.21,52.48 40.71,52.48 40.63,52.4 40.53,52.3 40.53,49.68 37.39,46.54 37.13,46.27 v37.13,44.1 | 32.03,43.48 32.21,43.48 32.23,43.5 32.83,43.5 v33.03,43.5 | 32.03,43.48 31.63,43.48 | 31.63,43.48 v27.83,43.48 27.83,44.85 34.21,51.23 U1.3 | U1.8 42.08,53.73 42.08,52.6 U1.7 | 39.33,19.98 40.83,21.48 42.21,21.48 R6.2 | 39.33,19.98 39.21,19.85 R7.2 39.33,19.98 | 39.33,19.98 38.46,19.98 38.21,20.23 34.83,20.23 34.71,20.35 R8.2 34.58,20.48 19.71,35.35 | U2.2 8.71,39.23 8.71,38.73 12.23,35.2 17.32,35.2 R1.2 17.97,35.85 19.21,35.85 19.71,35.35 | 19.71,35.35 v19.83,35.48 | 86.96,69.1 86.96,66.72 R1_PINH1.2 | 86.96,69.1 87.71,69.1 D7.2 | R2_PINH1.2 92.96,64.47 92.96,66.6 91.58,66.6 86.96,66.6 R1_PINH1.2 | R1_PINH1.2 86.83,66.6 86.33,66.6 86.33,63.6 U3.2 86.21,63.48 86.21,62.85 v85.58,62.23 | 79.76,35.1 79.46,35.1 75.83,35.1 75.58,34.85 75.52,34.79 R_CL1.2 74.44,34.79 73.43,35.8 73.33,35.9 72.73,35.9 72.73,35.88 72.71,35.85 72.66,35.9 R9.2 | 79.76,35.1 84.21,35.1 90.66,28.65 119.62,28.65 121.89,30.92 122.4,30.92 124.46,32.98 129.08,32.98 129.08,32.35 IC4.5 129.21,32.23 132.71,32.23 C3.+ 132.83,32.1 136.21,32.1 136.21,31.48 C1_BAT2.1 136.33,31.35 136.96,31.35 149.59,18.72 J3.2
  Top 0.3: 79.76,35.1 Q2.3 79.31,36.01 v79.31,48.8 79.31,51.48 79.33,51.5 78.36,52.48 76.58,52.48 75.63,52.48 64.83,52.48 63.33,52.48 59.63,52.48 | 59.63,52.48 42.14,52.48 U1.7 | TP16.TP 63.21,52.48 59.63,52.48 | v33.18,41.45 36.88,41.45 36.93,41.5 v37.03,41.6 | 86.96,69.1 86.96,69.97 86.98,70 86.98,93.2 80.01,100.17 78.13,102.05 65.88,102.05 60.78,102.05 59.43,103.4 58.16,104.67 | 31.63,43.48 31.89,43.48 R5.2 32.03,43.33 32.03,43.48
  Bottom 0.3: v85.58,62.23 85.58,55.73 82.58,52.73 82.58,51.48 80.08,48.98 79.91,48.8 v79.31,48.8 | v33.03,43.5 33.03,41.5 33.13,41.4 v33.18,41.45 | v37.03,41.6 37.03,44 v37.13,44.1 | v27.83,43.48 27.83,41.6 21.63,35.4 19.91,35.4 v19.83,35.48
32KHZ  (via drill 0.3)
  Top 0.15: 87.83,63.35 87.71,63.35 87.58,63.48 U3.1 87.83,63.35 | 87.83,63.35 92.71,63.35 92.83,63.23 R2_PINH1.1 | v18.08,38.1 17.58,38.1 17.58,39.23 U2.9 | v22.21,42.23 66.71,42.23 75.76,51.27 v75.76,51.37 | 87.83,63.35 v82.21,57.73
  Bottom 0.15: v22.21,42.23 v18.08,38.1 | v82.21,57.73 75.85,51.37 v75.76,51.37
DN
  Top 0.15: 162.71,53.85 162.83,53.73 163.58,53.73 J2.B7 | 162.71,53.85 162.71,54.6 163.58,54.6 J2.A7 | 162.71,53.85 157.33,53.85 151.46,47.98 D1.1
DP  (via drill 0.3)
  Top 0.15: J2.A6 163.71,54.1 164.46,54.1 164.71,54.35 164.71,55.1 163.71,55.1 J2.B6 163.58,55.1 v161.83,55.1 | v152.83,46.1 151.46,46.1 D1.3
  Bottom 0.15: v161.83,55.1 v152.83,46.1
EPD_3V3  (via drill 0.3)
  Top 0.3: J1.16 84.58,15.1 84.96,15.1 J1.15 85.08,14.97 v85.08,14.22 | 87.08,23.85 88.13,22.8 89.03,21.9 89.96,20.98 EPD_C3.2 90.08,20.85 v89.46,20.23 | 87.08,23.85 84.08,26.85 84.08,32.6 83.96,32.6 C7.1 83.83,32.73 83.58,32.98 83.21,32.98 | 83.21,32.98 79.08,32.98 77.94,34.12 Q2.2 | L1.2 85.83,35.69 v85.83,35.25 | 83.21,32.98 v83.21,33.1 | TP17.TP 88.19,22.74 87.08,23.85
  Bottom 0.3: v85.08,14.22 89.46,18.6 v89.46,20.23 | v85.83,35.25 83.68,33.1 v83.21,33.1
EPD_3V3_C  (via drill 0.3)
  Top 0.3: 75.21,36.23 75.08,36.1 R_CL1.1 75.21,36.23 | 75.21,36.23 77.88,36.23 Q2.1 | v74.08,36.35 74.21,36.23 75.21,36.23 | U2.18 20.08,56.73 20.08,55.73 22.46,55.73 23.08,55.1 48.43,55.1 TP13.TP v55.32,55.11 v55.33,55.1
  Bottom 0.3: v74.08,36.35 v55.33,55.1
EPD_BUSY  (via drill 0.3, 0.35)
  Top 0.15: v54.46,34.65 64.73,34.65 79.41,19.98 84.71,19.98 85.46,20.73 85.46,21.6 85.83,21.98 86.96,21.98 88.05,20.88 J1.9 | v35.21,54.1 35.08,54.23 11.96,54.23 9.96,56.23 9.96,56.73 U2.26
  Top 0.152: v47.43,46.6 47.43,48 47.43,49.22 TP9.TP
  Bottom 0.15: v35.21,54.1 43.77,45.54 | v54.46,34.65 43.57,45.54
  Bottom 0.152: 43.57,45.54 43.77,45.54 46.37,45.54 v47.43,46.6
EPD_CS  (via drill 0.3)
  Top 0.15: v86.33,20.1 86.58,20.1 86.58,15.1 J1.12 | v86.33,23.6 78.83,31.1 78.83,31.98 78.71,31.98 D6.2 78.58,32.1 78.33,32.35 74.96,32.35 72.71,34.6 R9.1 72.58,34.6 72.08,34.6 70.83,35.85 46.43,35.85 42.13,35.85 21.33,35.85 21.03,35.85 20.08,36.8 20.08,39.23 U2.11
  Top 0.152: 42.13,35.85 44.13,35.85 TP10.TP 46.37,35.91 46.43,35.85
  Bottom 0.15: v86.33,23.6 v86.33,20.1
EPD_DC  (via drill 0.3, 0.35)
  Top 0.15: v75.83,10.85 68.81,3.83 67.69,2.7 43.13,2.7 v12.63,33.2 | J1.11 87.08,14.97 87.08,14.68 86.62,14.22 85.79,14.22 v85.75,14.18 | U2.5 12.53,39.23 v12.53,37.5
  Top 0.152: 68.81,3.83 67.87,2.89 TP11.TP
  Bottom 0.15: 83.21,11.72 82.33,10.85 v75.83,10.85 | v12.53,37.5 12.53,33.2 v12.63,33.2
  Bottom 0.152: 83.21,11.72 84.81,11.72 84.83,11.7 85.71,12.57 85.71,14.14 v85.75,14.18
EPD_RST  (via drill 0.3)
  Top 0.15: v68.71,16.48 70.63,16.48 71.71,16.48 72.96,15.22 74.46,13.72 87.58,13.72 87.58,14.97 J1.10 | v17.58,54.85 16.33,56.1 16.33,56.73 U2.21
  Top 0.152: 70.63,16.48 71.78,16.48 TP12.TP 71.84,16.34 72.96,15.22
  Bottom 0.15: v68.71,16.48 55.81,29.38 42.58,42.6 42.58,44.48 32.21,54.85 v17.58,54.85
FLASH_CS  (via drill 0.3)
  Top 0.15: v21.96,38.23 21.33,38.23 21.33,39.23 U2.12 | U1.1 34.32,53.74 36.28,51.78 36.28,46.61 34.65,44.98 34.33,44.98 34.21,44.85 D9.2 34.08,44.73 32.21,44.73 32.08,44.6 R5.1 v28.34,44.6
  Bottom 0.15: v21.96,38.23 v28.33,44.6 v28.34,44.6
GDR
  Top 0.15: 70.96,13.72 70.96,13.85 R4.2 70.96,13.72 | 70.96,13.72 70.96,13.6 71.58,12.98 71.58,12.4 71.58,12.01 71.84,11.75 | J1.2 91.58,14.97 91.58,10.47 76.83,10.47 75.56,11.75 74.83,11.75 | 70.96,13.72 68.33,13.72 67.46,14.6 Q3.1
  Top 0.152: 74.83,11.75 73.99,10.9 73.23,10.9 72.69,10.9 71.84,11.75
GND  (via drill 0.35)
  Top 0.15: TP5.TP 46.13,95.47 50.51,95.47 TP4.TP | U2.29_5 13.08,46.6 13.08,47.73 U2.29_6 | R1_PWRUSB.1 118.13,30.7 117.93,30.5 117.83,30.4 117.83,30.1 v117.93,30.1 | v118.33,27.5 122.46,27.5 C1_BAT1.2 | v61.93,105.8 62.32,106.19 CHANGE_BUTTON.1
  Top 0.152: v35.43,47.2 33.23,47.2 31.93,45.9 31.43,45.9 31.23,46.1 31.23,46.2 31.23,46.9 31.25,46.9 U1.4 35.08,49.2 35.33,49.2 v35.43,49.2 | v35.93,43.6 35.62,43.29 D9.1 | C9.2 9.7,101.27 11.03,102.6 12.43,102.6 v12.93,102.1 | v13.93,98.7 14.16,98.47 D8.1 | D6.1 82.23,29.9 82.73,29.9 v83.23,29.9 | v85.33,30.6 85.21,30.72 C7.2 | R2.1 66.63,10.65 66.63,11.5 67.13,12 v68.63,12 | v72.03,12.2 72.03,12.7 72.03,12.9 72.25,13.12 R4.1 | EPD_C9.1 76.85,20.9 v76.93,20.9 | v78.33,22.3 78.57,22.54 EPD_C8.1 | D1.5 153.89,47 v155.23,47 | v153.53,44.3 152.73,43.5 152.73,43 153.26,42.47 R2-USB.2 | C5_USB.2 156.73,48.8 v157.03,48.5 | U2.1 7.36,40.33 10.03,43 v10.06,43 | v11.63,43.8 11.93,44.1 11.93,44.2 11.93,45.22 U2.29_1 | J2.MP3 164.26,47.68 v164.43,47.5 | v166.03,46.4 167.03,46.4 168.19,47.55 J2.MP1 | J1.17 84.05,14.22 v84.03,14.2 | v84.53,12.6 86.93,12.6 v87.03,12.6 | v88.63,14 88.55,14.08 J1.8 | C5.2 54.91,105.2 54.93,105.2 v55.03,105.1 | v57.53,101.6 55.15,99.22 C_DELAY.2 52.02,96.81 TP4.TP
  Bottom 0.15: v117.93,30.1 117.93,27.9 v118.33,27.5 | v55.03,105.1 61.23,105.1 v61.93,105.8
  Bottom 0.152: v35.43,47.2 35.93,46.7 v35.93,43.6 | v12.93,102.1 13.93,101.1 13.93,99.1 v13.93,98.7 | v83.23,29.9 84.63,29.9 v85.33,30.6 | v68.63,12 71.93,12 72.03,12.1 v72.03,12.2 | v76.93,20.9 v78.33,22.3 | v153.53,44.3 154.63,44.3 155.23,44.9 v155.23,47 156.53,47 156.83,47.3 157.03,47.5 v157.03,48.5 | v35.43,49.2 v36.73,49.2 | v164.43,47.5 165.53,46.4 165.93,46.4 v166.03,46.4 | v84.03,14.2 84.03,13.1 v84.53,12.6 | v87.03,12.6 87.63,12.6 88.63,13.6 88.63,13.8 v88.63,14 | v55.03,105.1 57.53,102.6 57.53,101.8 v57.53,101.6 | v10.06,43 10.86,43.8 v11.63,43.8
  pour Top: 96.1,10.74 96.11,10.72 96.11,0.58 169.66,0.58 169.66,65.92 91.41,65.92 91.41,65.38 91.4,65.36 91.38,65.34 91.35,65.32 91.32,65.32 91.29,65.34 91.27,65.36 91.26,65.38 91.26,65.92 91.25,65.92 91.25,65.92 91.23,65.92 91.22,65.92 91.22,65.92 91.22,65.92 91.2,65.93 91.19,65.94 91.19,65.94 91.19,65.94 91.18,65.95 91.17,65.96 91.17,65.96 91.17,65.96 91.16,65.97 91.16,65.98 91.16,65.98 91.16,65.99 91.16,66 91.16,66.02 91.16,66.02 91.26,109.42 1.01,109.42 1.01,0.58 75.96,0.58 75.96,10.72 75.97,10.74 75.99,10.76 76.02,10.78 96.05,10.78 96.08,10.76
  pour Bottom: 169.46,0.58 169.46,66.02 91.22,66.02 91.19,66.04 91.17,66.06 91.16,66.08 91.16,109.32 91.16,109.32 1.01,109.32 1.01,0.48 75.86,0.48 75.86,10.62 75.87,10.64 75.89,10.66 75.92,10.68 96.05,10.68 96.08,10.66 96.1,10.64 96.11,10.62 96.11,0.58
GPIO8
  Top 0.15: U2.10 18.79,36.62 R1.1
I2C_PW  (via drill 0.3)
  Top 0.3: C1.1 157.46,7.1 156.08,7.1 C2.1 | R1_PINH.2 160.83,5.6 159.33,5.6 R2_PINH.2 159.21,5.72 158.96,5.72 157.58,7.1 C1.1 | 158.21,10.35 156.83,10.35 SENSOR2.6 | 158.71,10.85 158.96,11.1 159.71,11.1 SENSOR2.2 | 158.71,10.85 158.21,10.35 | 157.71,11.85 156.83,11.85 SENSOR2.8 | 158.71,10.85 157.71,11.85 | v80.58,58.48 21.33,58.48 21.33,56.85 U2.17 | 157.71,11.85 v157.83,11.97 | 158.21,10.35 158.46,10.35 158.46,8.1 157.58,7.22 C1.1
  Bottom 0.3: v80.58,58.48 91.33,69.22 91.96,69.22 91.96,67.14 92.38,66.72 156.27,66.72 169.83,53.17 169.83,45.6 169.76,35.9 157.83,23.98 v157.83,11.97
INT_RTC  (via drill 0.3)
  Top 0.15: R1_PINH1.1 85.58,66.6 85.58,64.97 85.58,63.6 85.08,63.6 U3.3 | v16.33,38.1 16.33,39.23 U2.8 | v23.21,61.1 27.08,64.97 43.03,64.97
  Top 0.152: 43.03,64.97 45.53,64.97 TP15.TP 45.66,64.97 85.58,64.97
  Bottom 0.15: v16.33,38.1 17.08,38.85 17.08,54.98 v23.21,61.1
IO/BOOT  (via drill 0.3)
  Top 0.15: C6.1 28.21,108.22 27.71,108.72 26.21,108.72 BOOT_BUTTON.3 26.08,108.72 22.71,108.72 BOOT_BUTTON.4 22.58,108.6 22.33,108.35 21.08,108.35 | 21.08,108.35 20.96,108.22 R_BOOT.2 21.08,108.35 | 21.08,108.35 20.96,108.35 19.58,109.72 15.89,109.72 1.79,95.62 1.79,90.14 v23.71,68.22 | v23.83,57.97 23.83,56.86 U2.15
  Bottom 0.15: v23.71,68.22 23.71,58.1 v23.83,57.98 v23.83,57.97
IO/CHANGE  (via drill 0.3, 0.35)
  Top 0.15: C10.1 68.21,108.22 68.08,108.35 66.58,108.35 65.82,109.11 | v15.83,60.98 13.83,60.98 13.83,56.85 U2.23 | v26.73,72.07 32.33,72.07 46.14,85.89 47.69,87.44 57.69,97.44 59.13,98.88 v59.13,98.9 | 60.33,107.97 R_CHANGE.2 60.33,108.1 60.86,108.62 61.84,108.62 62.32,109.11 | 65.82,109.11 | 65.82,109.11 CHANGE_BUTTON.3 65.82,109.11 | 65.82,109.11 | 62.32,109.11 | 62.32,109.11 CHANGE_BUTTON.4 62.32,109.11 | 62.32,109.11 | 65.82,109.11 62.32,109.11 | v61.33,103.5 61.33,106.97 61.32,106.99
  Top 0.152: 61.32,106.99 60.33,107.97
  Bottom 0.15: v26.73,72.07 15.83,61.18 v15.83,60.98 | v59.13,98.9 61.33,101.1 61.33,103.4 v61.33,103.5
MISO  (via drill 0.3, 0.35)
  Top 0.15: 34.58,23.85 34.58,21.73 R8.1 | 34.58,23.85 34.33,23.85 D12.2 34.58,23.85 | v7.58,93.47 6.58,93.47 6.46,93.6 J4.P7 | v7.46,58.73 8.58,57.6 8.58,56.85 U2.27 8.71,56.73 8.71,56.23 11.08,53.85 32.96,53.85 34.21,52.6 U1.2 34.33,52.48 34.58,52.48 v34.58,51.85 | v35.21,24.48 34.58,23.85
  Top 0.152: v6.33,76.4 3.35,76.4 TP6.TP
  Bottom 0.15: v7.58,93.47 7.46,93.35 7.46,76.5 7.46,75 v7.46,58.73 | v35.21,24.48 34.58,25.1 v34.58,51.85
  Bottom 0.152: 7.46,76.5 7.36,76.4 6.53,76.4 v6.33,76.4
MOSI  (via drill 0.3)
  Top 0.15: 40.71,22.23 42.83,22.23 43.08,21.98 43.08,21.1 42.83,20.85 41.46,20.85 41.33,20.73 41.33,19.85 41.71,19.48 66.96,19.48 68.71,17.73 85.58,17.73 85.58,17.4 85.58,16.9 85.58,15.1 J1.14 | 40.71,22.23 39.71,21.23 39.21,21.23 R7.1 | v42.08,44.35 42.08,49.85 U1.5 42.08,49.98 41.54,49.98 v41.25,49.68 | v39.71,24.35 39.21,23.85 39.08,23.85 | 39.08,23.85 38.83,23.85 D11.2 39.08,23.85 | v39.58,40.48 15.08,40.48 15.08,39.35 U2.7 | v31.21,65.47 22.91,73.77 | 21.66,75.02 19.96,76.72 7.58,89.1 6.58,89.1 6.46,89.22 J4.P3 | 39.08,23.85 40.71,22.23
  Top 0.152: 22.91,73.77 21.66,75.02 | TP7.TP 21.49,75.19 19.96,76.72
  Bottom 0.15: v42.08,44.35 39.71,41.98 39.71,40.48 | v39.71,24.35 39.71,40.48 | 39.71,40.48 v39.58,40.48 | v31.21,65.47 41.21,55.48 41.21,49.73 v41.25,49.68
N$1
  Top 0.15: 154.08,43.5 154.08,41.85 154.33,41.6 154.58,41.6 154.58,40.85 R2-USB1.2 | 155.08,44.6 162.21,51.73 162.21,53.1 163.58,53.1 J2.A5
  Top 0.152: 155.08,44.6 154.08,43.6 154.08,43.5
N$2
  Top 0.15: 160.46,46.1 158.46,46.1 154.83,42.48 R2-USB.1 | 165.58,56.1 163.71,56.1 J2.B5
  Top 0.152: 160.46,46.1 164.23,46.1 166.33,48.2 166.33,55.35 165.58,56.1
N$3  (via drill 0.3)
  Top 0.15: v90.71,58.35 90.71,53.23 R_CAPACITOR.2 | D7.1 89.96,69.1 90.33,69.1 v91.13,68.31
  Bottom 0.15: v90.71,58.35 91.46,59.1 91.46,67.97 v91.13,68.31
N$4  (via drill 0.3)
  Top 0.15: 124.58,30.35 126.33,30.35 IC4.3 | 124.58,30.35 123.83,30.35 | 123.83,30.35 122.46,30.35 D2.1 | 124.58,30.35 124.58,28.35 C1_BAT1.1 | 125.71,32.23 126.33,32.23 IC4.1 | 123.83,30.35 125.71,32.23 | v128.58,35.6 128.58,36.98 Q1.2 | 125.71,32.23 v125.46,32.47
  Bottom 0.15: v128.58,35.6 v125.46,32.48 v125.46,32.47
N$5
  Top 0.15: 96.08,39.23 95.46,38.6 94.33,38.6 D3.2 | 96.08,39.23 96.21,39.35 C4.1 96.08,39.23 | 96.08,39.23 97.08,39.23 97.08,37.85 96.58,37.35 94.08,37.35 90.83,34.1 D4.1
N$8
  Top 0.15: 112.83,36 112.83,37.85 CHG_LED.C | 114.03,35.23 120.46,35.23 R1_BAT.2
  Top 0.152: 112.83,36 113.61,35.23 114.03,35.23
N$10  (via drill 0.3)
  Top 0.15: v121.21,37.1 121.08,37.1 120.58,36.6 R1_BAT.1 | MCP73831.1 122.58,38.73 122.25,38.39 v122.25,38.14
  Bottom 0.15: v122.25,38.14 v121.21,37.1
N$11
  Top 0.15: J1.5 90.08,15.1 90.08,20.23 90.58,20.23 91.33,20.98 EPD_C2.2
N$12
  Top 0.15: R2_BAT.1 117.33,38.23 117.83,38.73 119.96,38.73 MCP73831.5
N$14
  Top 0.15: J1.4 90.58,15.1 90.58,19.35 91.08,19.35 92.71,20.98 92.96,20.98 EPD_C1.2
N$19
  Top 0.15: IC1.5 50.08,100.6 51.96,100.6 C_DELAY.1
N$23  (via drill 0.3, 0.35)
  Top 0.15: v85.83,20.48 86.33,20.98 86.33,21.23 EPD_C4.2
  Top 0.152: v84.43,16 84.03,15.59 83.82,15.59 83.55,15.33 J1.18
  Bottom 0.15: 85.83,16.6 v85.83,20.48
  Bottom 0.152: v84.43,16 85.23,16 85.83,16.6
N$24  (via drill 0.3)
  Top 0.15: v83.46,15.85 83.08,15.85 83.08,15.1 J1.19 | v83.96,20.48 84.71,21.23 EPD_C5.2
  Bottom 0.15: v83.46,15.85 83.96,16.35 v83.96,20.48
N$25  (via drill 0.3)
  Top 0.15: v82.58,16.23 82.58,15.1 J1.20 | v82.83,20.48 82.83,21.23 83.08,21.23 EPD_C6.2
  Bottom 0.15: v82.58,16.23 82.83,16.48 v82.83,20.48
N$27  (via drill 0.3)
  Top 0.15: v81.58,17.23 81.58,15.1 J1.22 | v80.83,20.48 80.08,21.23 EPD_C8.2
  Bottom 0.15: v81.58,17.23 80.83,17.98 v80.83,20.48
N$29  (via drill 0.3)
  Top 0.15: v77.58,17.23 78.33,17.23 80.46,15.1 J1.24 | v75.33,19.48 74.83,18.98 74.46,18.98 EPD_C10.2
  Bottom 0.15: v75.33,19.48 v77.58,17.23
PREVGH  (via drill 0.3)
  Top 0.15: v82.08,16.85 82.08,15.1 J1.21 | v82.08,20.48 82.08,21.23 81.83,21.23 EPD_C7.2 | v82.46,42.73 82.46,44.85 D5.1
  Bottom 0.15: v82.08,16.85 v82.08,20.48 82.21,20.6 82.21,42.48 v82.46,42.73
PREVGL  (via drill 0.3)
  Top 0.15: v80.33,15.85 81.08,15.85 81.08,15.1 J1.23 | v77.46,18.73 76.08,18.73 EPD_C9.2 | v94.21,32.1 94.21,33.98 D4.2
  Bottom 0.15: v77.46,18.73 v80.33,15.85 80.33,15.72 82.71,15.72 83.33,16.35 83.33,21.23 v94.21,32.1
RESE
  Top 0.15: 68.83,14.85 72.83,14.85 74.33,13.35 91.08,13.35 91.08,14.97 J1.3 | 68.83,14.85 68.71,14.72 Q3.2 68.83,14.85 | 70.96,12.4 70.96,8.6 70.08,7.72 R3.2 | 69.53,12.95 67.98,12.95 66.71,14.22 66.71,15.6 67.71,15.6 68.46,14.85 68.83,14.85
  Top 0.152: 69.53,12.95 69.73,12.95 70.41,12.95 70.96,12.4
RESE'
  Top 0.15: R3.1 69.96,8.97 69.33,8.35 67.83,8.35 SJ1.2 67.83,8.47 67.96,8.47 67.96,10.6 R2.2
RESET  (via drill 0.3)
  Top 0.15: 46.21,108.1 46.21,101.72 47.21,100.72 IC1.1 | 46.21,108.1 45.46,108.1 R_RESET.2 45.33,108.22 44.83,108.22 v44.46,108.6 | 46.21,108.1 46.46,108.35 46.75,108.35 47.61,109.21 | v9.33,40.48 9.83,40.48 9.83,39.35 U2.3 | 51.11,109.21 | 51.11,109.21 RESET_BUTTON.3 | RESET_BUTTON.3 51.11,109.21 | 47.61,109.21 | 47.61,109.21 RESET_BUTTON.4 | 47.61,109.21 | RESET_BUTTON.4 47.61,109.21 | C5.1 51.85,108.18 RESET_BUTTON.3 | RESET_BUTTON.4 RESET_BUTTON.3
  Bottom 0.15: v9.33,40.48 9.33,54.48 6.15,57.66 6.15,57.87 1.79,62.22 1.79,91.6 19.42,109.22 20.21,109.22 20.83,108.6 v44.46,108.6
RTC_RST
  Top 0.15: U2.16 22.71,56.73 22.71,55.98 22.81,55.87 47.96,55.87 48.59,56.51 78.04,56.51 79.51,57.98 81.4,57.98 83.71,60.28 83.71,63.48 U3.4
RX
  Top 0.152: U2.24 12.44,62.47 TP2.TP
SCK  (via drill 0.3)
  Top 0.15: 45.33,20.23 42.33,20.23 R6.1 | 45.33,20.23 66.71,20.23 68.83,18.1 86.08,18.1 86.08,15.1 J1.13 | 45.33,20.23 41.83,23.73 D10.2 41.71,23.85 41.46,24.1 v40.96,24.1 | 41.08,42.6 22.46,42.6 22.33,42.73 21.43,42.73 20.83,42.73 | 41.08,42.6 42.96,42.6 42.96,50.48 42.21,51.23 U1.6 42.21,51.35 v41.71,51.85 | 19.33,42.73 17.63,42.73 16.58,42.73 13.83,39.98 13.83,39.35 U2.6 | J4.P5 6.46,91.47 6.54,91.39 v9.04,91.39 | 41.08,42.6 v41.08,42.73
  Top 0.152: 20.83,42.73 19.33,42.73 | 17.63,42.73 17.7,42.79 TP8.TP 21.37,42.79 21.43,42.73
  Bottom 0.15: 23.28,77.15 41.71,58.73 v41.71,51.85 | 21.53,78.9 20.53,79.9 | v40.96,24.1 41.08,24.23 v41.08,42.73 | 20.38,80.05 v9.04,91.39
  Bottom 0.152: 20.53,79.9 20.38,80.05 | 23.28,77.15 21.53,78.9
SCL  (via drill 0.3)
  Top 0.15: SENSOR2.4 159.71,9.47 159.33,9.47 159.33,6.97 R2_PINH.1 159.33,6.85 159.96,6.22 161.58,6.22 166.23,10.88 166.23,19.83 165.34,20.72 | U4.7 132.21,43.73 v134.06,43.73 148.96,43.73 152.83,39.85 154.83,39.85 155.21,40.23 155.46,40.23 163.71,31.98 163.71,22.35 165.34,20.72 | 86.58,55.6 87.46,54.73 87.46,54.23 U3.16 | 86.58,55.6 85.96,56.23 78.96,56.23 78.33,55.6 | U2.20 17.58,56.73 17.58,55.35 22.21,55.35 22.96,54.6 48,54.6 48.37,54.23 | v91.96,60.23 87.33,55.6 86.58,55.6 | 165.34,20.72 J3.4 | J3.4 | 165.34,20.72 J3.4
  Top 0.152: 48.37,54.23 49.2,53.4 60.53,53.4 62.73,55.6 78.33,55.6
  Bottom 0.15: v134.06,43.73 111.43,66.35 91.96,66.35 v91.96,60.23
SDA  (via drill 0.3)
  Top 0.15: 160.83,10.35 160.83,6.97 R1_PINH.1 | 160.83,10.35 159.83,10.35 SENSOR2.3 | v138.83,44.23 132.21,44.23 U4.8 132.08,44.35 132.08,49.2 | v158.08,24.98 163.33,19.73 165.34,19.73 165.34,19.72 | U2.19 18.83,56.85 18.83,57.09 20.68,58.93 v81.75,58.93 | 129.73,51.1 88.83,51.1 86.33,53.6 86.33,54.1 U3.15 86.21,54.23 86.21,54.85 85.46,55.6 85.08,55.6 v84.91,55.77 | 165.34,19.72 J3.3 | J3.3 | 165.34,19.72 J3.3 | 165.34,19.72 | 165.34,19.72 165.96,19.11 165.96,15.47 160.83,10.35
  Top 0.152: 132.08,49.2 130.18,51.1 129.73,51.1
  Bottom 0.15: v158.08,24.98 v138.83,44.23 | v84.91,55.77 v81.75,58.93
SRC  (via drill 0.3)
  Top 0.15: 84.33,41.85 86.08,41.85 | 86.08,41.85 89.08,41.85 93.21,37.73 94.96,37.73 95.08,37.85 95.96,37.85 96.21,38.1 C4.2 | 84.33,41.85 L1.1 84.33,41.85 | v68.08,17.73 68.08,16.85 Q3.3 | v80.81,39.55 83.11,41.85 84.33,41.85 | 86.08,41.85 86.08,44.85 D5.2
  Bottom 0.15: v68.08,17.73 76.51,26.15 76.51,35.25 v80.81,39.55
SS_SD  (via drill 0.3)
  Top 0.15: R10.1 11.46,100.22 v12.21,99.47 16.21,99.47 16.83,98.85 16.83,98.47 D8.2 | v11.08,40.48 11.08,39.35 U2.4 | v7.96,87.85 7.71,88.1 6.83,88.1 J4.P2
  Bottom 0.15: v12.21,99.47 8.08,95.35 8.08,87.97 v7.96,87.85 7.96,56.24 9.61,54.59 9.61,41.95 v11.08,40.48
TX
  Top 0.152: U2.25 11.17,61.96 TP1.TP
USB_D+  (via drill 0.3)
  Top 0.15: v93.83,63.35 97.08,66.6 127.21,66.6 148.46,45.35 153.21,45.35 153.83,45.98 D1.4 | v73.21,40.23 39.96,40.23 39.08,39.35 23.96,39.35 U2.14
  Bottom 0.15: v93.83,63.35 92.46,61.98 92.46,59.48 v73.21,40.23
USB_D-  (via drill 0.3)
  Top 0.15: 154.43,47.73 154.08,47.73 153.96,47.85 D1.6 | 154.93,44.98 148.33,44.98 127.08,66.22 97.33,66.22 v87.21,56.1 | v71.46,39.73 69.96,38.23 23.21,38.23 22.71,38.73 22.71,39.23 U2.13
  Top 0.152: 154.93,44.98 156.33,46.38 156.33,46.9 156.33,47.2 155.83,47.7 155.81,47.73 154.43,47.73
  Bottom 0.15: v87.21,56.1 82.96,51.85 82.96,51.23 v71.46,39.73
VBAT
  Top 0.3: U4.2 130.33,43.73 130.33,43.35 U4.3 130.21,43.23 129.33,43.23 129.22,43.11 | 123.83,42.23 123.08,41.48 123.08,40.85 122.71,40.85 MCP73831.3 | 123.83,42.23 124.58,42.98 C2_BAT.1 | 123.83,42.23 124.58,42.23 126.31,40.5 126.46,40.35 127.58,39.23 127.64,39.19 | 127.64,39.19 Q1.3 | 129.22,43.11 129.07,42.96 129.07,40.44 127.82,39.19 127.64,39.19 | 129.22,43.11 128.33,44 128.28,44.05 127.73,44.6 127.33,44.6 126.93,45 126.93,46.1 126.93,46.54 TP3.TP
VBUS  (via drill 0.3)
  Top 0.3: 150.46,47.1 150.58,46.98 151.33,46.98 D1.2 151.46,46.98 152.33,46.98 152.33,47.68 153.25,48.6 154.33,48.6 155.83,50.1 C5_USB.1 | 150.46,47.1 150.08,47.48 149.08,47.48 148.96,47.6 C4_USB.1 | v150.21,41.85 150.21,37.6 PMF.050.1.2 150.08,37.6 149.83,37.85 127.96,37.85 127.21,37.1 126.83,37.1 Q1.1 126.71,36.98 124.71,34.98 | 150.46,47.1 v150.33,46.98 | 121.96,32.23 122.33,32.23 D2.2 | 121.96,32.23 119.83,32.23 119.71,32.1 R1_PWRUSB.2 | 121.96,32.23 124.71,34.98 | 115.46,42.1 115.58,42.23 C1_BAT.1 115.46,42.1 | 115.46,42.1 114.49,41.14 | 114.49,41.14 111.33,37.98 CHG_LED.A | 115.46,42.1 115.58,42.1 116.83,40.85 119.96,40.85 MCP73831.4 120.08,40.73 121.08,40.73 121.08,38.6 124.71,34.98 | 114.49,41.14 113.57,40.21 TP14.TP
  Bottom 0.3: v150.21,41.85 150.33,41.98 v150.33,46.98
VRTC  (via drill 0.3)
  Top 0.3: C10_SUPERCAP.2 93.71,52.6 91.33,52.6 90.71,51.98 R_CAPACITOR.1 90.58,51.98 90.46,52.1 v88.46,52.1 | 85.71,52.23 85.71,54.1 85.08,54.1 U3.14 | 85.71,52.23 85.71,51.35 C8.1 | v86.33,52.1 86.21,52.23 85.71,52.23
  Bottom 0.3: v86.33,52.1 v88.46,52.1
VUSB  (via drill 0.3)
  Top 0.3: J2.A4 163.71,51.85 163.71,52.1 J2.B9 163.58,52.1 v162.71,52.1 | J2.A9 163.71,56.85 163.71,56.73 J2.B4 163.58,56.73 162.96,56.73 v162.71,56.48 | v155.83,38.85 154.58,37.6 PMF.050.1.1
  Bottom 0.3: v162.71,56.48 v162.71,52.1 155.83,45.23 v155.83,38.85

## Text on the board
tPlace: GND | GND | MOSI | MISO | TX | RX | INT_RTC | EPD_3V3_C | EPD_BUSY | 3v3 | VBAT | SCK | VBUS | EPD_CS | EPD_3v3 | EPD_RST | EPD_DC